# EAGLE board Prueba1 (EAGLE 9.7.0)

Size 362.69 x 140.34 mm. Coordinates in mm from the lower left corner, seen from the top.
Outline: 0,0 362.69,0 362.69,140.34 0,140.34 0,0
Copper layers (1*16): Top 0.035mm / dielectric 1.5mm / Bottom 0.035mm
Design rules "default": minimum track width 6mil, minimum drill 0.35mm, track to track 6mil, track to pad 6mil, pad to pad 6mil, via to via 6mil, smd to smd 6mil, copper to edge 40mil, drill to drill 6mil, minimum pad ring 10mil, minimum via ring 8mil, stop-mask expansion 4mil, vias tented up to drill 0mil, thermal gap 10mil

## Footprints (pad centres in the part's own frame; a part is rotated, then mirrored left to right if it is on the bottom)
LEDRD254W60D565H860B = drill 0.981 pad 1.581: 1 -1.27,0; 2 1.27,0
RESAD1016W63L850D250B = drill 0.83 pad 1.43: 1 -5.08,0; 2 5.08,0
DIP762W53P254L1969H508Q16B = drill 0.743 pad 1.343: 1 -3.81,8.89; 2 -3.81,6.35; 3 -3.81,3.81; 4 -3.81,1.27; 5 -3.81,-1.27; 6 -3.81,-3.81; 7 -3.81,-6.35; 8 -3.81,-8.89; 9 3.81,-8.89; 10 3.81,-6.35; 11 3.81,-3.81; 12 3.81,-1.27; 13 3.81,1.27; 14 3.81,3.81; 15 3.81,6.35; 16 3.81,8.89
ARDUINO-UNO-R3-SHIELD = drill 1.016 pad 1.88: 3.3V 24.13,-2.54; 5V 24.13,0; A0 24.13,12.7; A1 24.13,15.24; A2 24.13,17.78; A3 24.13,20.32; A4 24.13,22.86; A5 24.13,25.4; AREF -24.13,-13.97; D2 -24.13,20.32; D3 -24.13,17.78; D4 -24.13,15.24; D5 -24.13,12.7; D6 -24.13,10.16; D7 -24.13,7.62; D8 -24.13,3.81; D9 -24.13,1.27; D10 -24.13,-1.27; D11 -24.13,-3.81; D12 -24.13,-6.35; D13 -24.13,-8.89; GND@0 24.13,2.54; GND@1 24.13,5.08; GND@2 -24.13,-11.43; IOREF 24.13,-7.62; NC 24.13,-10.16; RES 24.13,-5.08; RX -24.13,25.4; SCL -24.13,-19.05; SDA -24.13,-16.51; TX -24.13,22.86; VIN 24.13,7.62

## Placement (x,y rotation side)
D1  RED  [LEDRD254W60D565H860B]  107.71,26.48 0 top
D2  RED  [LEDRD254W60D565H860B]  114.22,26.36 0 top
D3  RED  [LEDRD254W60D565H860B]  120.35,26.23 0 top
D4  RED  [LEDRD254W60D565H860B]  126.22,26.19 0 top
D5  RED  [LEDRD254W60D565H860B]  132.02,26.09 0 top
D6  RED  [LEDRD254W60D565H860B]  137.71,26.12 0 top
D7  RED  [LEDRD254W60D565H860B]  143.28,26.08 0 top
D8  RED  [LEDRD254W60D565H860B]  148.67,26.13 0 top
D9  RED  [LEDRD254W60D565H860B]  108.87,76.98 0 top
D10  RED  [LEDRD254W60D565H860B]  114.3,77.15 0 top
D11  RED  [LEDRD254W60D565H860B]  119.97,77.11 0 top
D12  RED  [LEDRD254W60D565H860B]  125.65,77.1 0 top
D13  RED  [LEDRD254W60D565H860B]  131.21,77.17 0 top
D14  RED  [LEDRD254W60D565H860B]  136.57,77.17 0 top
D15  RED  [LEDRD254W60D565H860B]  141.55,76.94 0 top
D16  RED  [LEDRD254W60D565H860B]  147.26,77.17 0 top
D17  RED  [LEDRD254W60D565H860B]  107.97,66.52 0 top
D18  RED  [LEDRD254W60D565H860B]  113.41,66.4 0 top
D19  RED  [LEDRD254W60D565H860B]  119.52,66.24 0 top
D20  RED  [LEDRD254W60D565H860B]  125.32,66.11 0 top
D21  RED  [LEDRD254W60D565H860B]  131.13,65.96 0 top
D22  RED  [LEDRD254W60D565H860B]  136.31,66.19 0 top
D23  RED  [LEDRD254W60D565H860B]  141.53,66.21 0 top
D24  RED  [LEDRD254W60D565H860B]  147.62,66.4 0 top
D25  RED  [LEDRD254W60D565H860B]  108.29,55.86 0 top
D26  RED  [LEDRD254W60D565H860B]  113.87,55.67 0 top
D27  RED  [LEDRD254W60D565H860B]  119.78,55.81 0 top
D28  RED  [LEDRD254W60D565H860B]  125.63,55.85 0 top
D29  RED  [LEDRD254W60D565H860B]  131.77,55.85 0 top
D30  RED  [LEDRD254W60D565H860B]  137.34,55.87 0 top
D31  RED  [LEDRD254W60D565H860B]  142.61,55.88 0 top
D32  RED  [LEDRD254W60D565H860B]  147.83,55.83 0 top
D33  RED  [LEDRD254W60D565H860B]  107.87,46.09 0 top
D34  RED  [LEDRD254W60D565H860B]  114.45,46.16 0 top
D35  RED  [LEDRD254W60D565H860B]  120.6,46.2 0 top
D36  RED  [LEDRD254W60D565H860B]  126.04,46.17 0 top
D37  RED  [LEDRD254W60D565H860B]  131.91,46.08 0 top
D38  RED  [LEDRD254W60D565H860B]  137.69,46.07 0 top
D39  RED  [LEDRD254W60D565H860B]  143,46.02 0 top
D40  RED  [LEDRD254W60D565H860B]  148.37,45.99 0 top
D41  RED  [LEDRD254W60D565H860B]  107.68,36.02 0 top
D42  RED  [LEDRD254W60D565H860B]  114.49,36.02 0 top
D43  RED  [LEDRD254W60D565H860B]  120.67,35.92 0 top
D44  RED  [LEDRD254W60D565H860B]  126.16,35.9 0 top
D45  RED  [LEDRD254W60D565H860B]  131.88,35.75 0 top
D46  RED  [LEDRD254W60D565H860B]  137.4,35.64 0 top
D47  RED  [LEDRD254W60D565H860B]  142.83,35.67 0 top
D48  RED  [LEDRD254W60D565H860B]  148.43,35.58 0 top
D49  RED  [LEDRD254W60D565H860B]  107.76,17.01 0 top
D50  RED  [LEDRD254W60D565H860B]  114.26,16.93 0 top
D51  RED  [LEDRD254W60D565H860B]  120.55,16.8 0 top
D52  RED  [LEDRD254W60D565H860B]  126.43,16.81 0 top
D53  RED  [LEDRD254W60D565H860B]  132.04,16.81 0 top
D54  RED  [LEDRD254W60D565H860B]  137.85,16.77 0 top
D55  RED  [LEDRD254W60D565H860B]  143.66,16.78 0 top
D56  RED  [LEDRD254W60D565H860B]  149.03,16.7 0 top
D57  RED  [LEDRD254W60D565H860B]  107.9,8.45 0 top
D58  RED  [LEDRD254W60D565H860B]  114.32,8.42 0 top
D59  RED  [LEDRD254W60D565H860B]  120.55,8.51 0 top
D60  RED  [LEDRD254W60D565H860B]  126.31,8.36 0 top
D61  RED  [LEDRD254W60D565H860B]  132.26,8.23 0 top
D62  RED  [LEDRD254W60D565H860B]  137.92,8.05 0 top
D63  RED  [LEDRD254W60D565H860B]  143.92,7.91 0 top
D64  RED  [LEDRD254W60D565H860B]  149.89,8.06 0 top
R1  470  [RESAD1016W63L850D250B]  282.96,99.43 270 top
R2  470  [RESAD1016W63L850D250B]  285.5,99.43 270 top
R3  470  [RESAD1016W63L850D250B]  288.04,99.43 270 top
R4  470  [RESAD1016W63L850D250B]  290.58,99.43 270 top
R5  470  [RESAD1016W63L850D250B]  293.12,99.43 270 top
R6  470  [RESAD1016W63L850D250B]  295.66,99.43 270 top
R7  470  [RESAD1016W63L850D250B]  298.2,99.43 270 top
R8  470  [RESAD1016W63L850D250B]  300.74,99.43 270 top
R9  470  [RESAD1016W63L850D250B]  107.82,99.5 270 top
R10  470  [RESAD1016W63L850D250B]  112.9,99.5 270 top
R11  470  [RESAD1016W63L850D250B]  115.44,99.5 270 top
R12  470  [RESAD1016W63L850D250B]  117.98,99.5 270 top
R13  470  [RESAD1016W63L850D250B]  120.52,99.5 270 top
R14  470  [RESAD1016W63L850D250B]  123.06,99.5 270 top
R15  470  [RESAD1016W63L850D250B]  125.6,99.5 270 top
R16  470  [RESAD1016W63L850D250B]  128.14,99.5 270 top
R17  470  [RESAD1016W63L850D250B]  138.3,99.5 270 top
R18  470  [RESAD1016W63L850D250B]  140.84,99.5 270 top
R19  470  [RESAD1016W63L850D250B]  143.38,99.5 270 top
R20  470  [RESAD1016W63L850D250B]  145.92,99.5 270 top
R21  470  [RESAD1016W63L850D250B]  148.46,99.5 270 top
R22  470  [RESAD1016W63L850D250B]  151,99.5 270 top
R23  470  [RESAD1016W63L850D250B]  153.54,99.5 270 top
R24  470  [RESAD1016W63L850D250B]  156.08,99.5 270 top
R25  470  [RESAD1016W63L850D250B]  166.24,99.5 270 top
R26  470  [RESAD1016W63L850D250B]  168.78,99.5 270 top
R27  470  [RESAD1016W63L850D250B]  171.32,99.5 270 top
R28  470  [RESAD1016W63L850D250B]  173.86,99.5 270 top
R29  470  [RESAD1016W63L850D250B]  176.4,99.5 270 top
R30  470  [RESAD1016W63L850D250B]  178.94,99.5 270 top
R31  470  [RESAD1016W63L850D250B]  181.48,99.5 270 top
R32  470  [RESAD1016W63L850D250B]  184.02,99.5 270 top
R33  470  [RESAD1016W63L850D250B]  194.18,99.5 270 top
R34  470  [RESAD1016W63L850D250B]  196.72,99.5 270 top
R35  470  [RESAD1016W63L850D250B]  199.26,99.5 270 top
R36  470  [RESAD1016W63L850D250B]  201.8,99.5 270 top
R37  470  [RESAD1016W63L850D250B]  204.34,99.5 270 top
R38  470  [RESAD1016W63L850D250B]  206.88,99.5 270 top
R39  470  [RESAD1016W63L850D250B]  209.42,99.5 270 top
R40  470  [RESAD1016W63L850D250B]  211.96,99.5 270 top
R41  470  [RESAD1016W63L850D250B]  222.12,99.5 270 top
R42  470  [RESAD1016W63L850D250B]  224.66,99.5 270 top
R43  470  [RESAD1016W63L850D250B]  227.2,99.5 270 top
R44  470  [RESAD1016W63L850D250B]  229.74,99.5 270 top
R45  470  [RESAD1016W63L850D250B]  232.28,99.5 270 top
R46  470  [RESAD1016W63L850D250B]  234.82,99.5 270 top
R47  470  [RESAD1016W63L850D250B]  237.36,99.5 270 top
R48  470  [RESAD1016W63L850D250B]  239.9,99.5 270 top
R49  470  [RESAD1016W63L850D250B]  308.36,99.43 270 top
R50  470  [RESAD1016W63L850D250B]  310.9,99.43 270 top
R51  470  [RESAD1016W63L850D250B]  313.44,99.43 270 top
R52  470  [RESAD1016W63L850D250B]  315.98,99.43 270 top
R53  470  [RESAD1016W63L850D250B]  318.52,99.43 270 top
R54  470  [RESAD1016W63L850D250B]  321.06,99.43 270 top
R55  470  [RESAD1016W63L850D250B]  323.6,99.43 270 top
R56  470  [RESAD1016W63L850D250B]  326.14,99.43 270 top
R57  470  [RESAD1016W63L850D250B]  336.3,99.43 270 top
R58  470  [RESAD1016W63L850D250B]  338.84,99.43 270 top
R59  470  [RESAD1016W63L850D250B]  341.38,99.43 270 top
R60  470  [RESAD1016W63L850D250B]  343.92,99.43 270 top
R61  470  [RESAD1016W63L850D250B]  346.46,99.43 270 top
R62  470  [RESAD1016W63L850D250B]  349,99.43 270 top
R63  470  [RESAD1016W63L850D250B]  351.54,99.43 270 top
R64  470  [RESAD1016W63L850D250B]  354.08,99.43 270 top
U2  74HC595_PDIP  [DIP762W53P254L1969H508Q16B]  121.79,110.93 90 top
U3  74HC595_PDIP  [DIP762W53P254L1969H508Q16B]  149.73,110.93 90 top
U4  ARDUINO-UNO-R3-SHIELD  [ARDUINO-UNO-R3-SHIELD]  47.88,110.49 270 top
U5  74HC595_PDIP  [DIP762W53P254L1969H508Q16B]  177.67,110.93 90 top
U6  74HC595_PDIP  [DIP762W53P254L1969H508Q16B]  205.61,110.93 90 top
U7  74HC595_PDIP  [DIP762W53P254L1969H508Q16B]  233.55,110.93 90 top
U10  74HC595_PDIP  [DIP762W53P254L1969H508Q16B]  294.39,110.86 90 top
U11  74HC595_PDIP  [DIP762W53P254L1969H508Q16B]  319.79,110.86 90 top
U12  74HC595_PDIP  [DIP762W53P254L1969H508Q16B]  347.73,110.86 90 top

## Library data of the parts
D1-D64 = Tinkercad; CATEGORY: Opto-Electronic; SUB-CATEGORY: LED; VALUE: LED_RED
R1-R64 U2-U7 U10-U12 = Tinkercad

## Nets
D1_A: D1.1 R1.2
D2_A: D2.1 R2.2
D3_A: D3.1 R3.2
D4_A: D4.1 R4.2
D5_A: D5.1 R5.2
D6_A: D6.1 R6.2
D7_A: D7.1 R7.2
D8_A: D8.1 R8.2
D9_A: D9.1 R9.2
D10_A: D10.1 R10.2
D11_A: D11.1 R11.2
D12_A: D12.1 R12.2
D13_A: D13.1 R13.2
D14_A: D14.1 R14.2
D15_A: D15.1 R15.2
D16_A: D16.1 R16.2
D17_A: D17.1 R17.2
D18_A: D18.1 R18.2
D19_A: D19.1 R19.2
D20_A: D20.1 R20.2
D21_A: D21.1 R21.2
D22_A: D22.1 R22.2
D23_A: D23.1 R23.2
D24_A: D24.1 R24.2
D24_C: D17.2 D18.2 D19.2 D20.2 D21.2 D22.2 D23.2 D24.2
D25_A: D25.1 R25.2
D26_A: D26.1 R26.2
D27_A: D27.1 R27.2
D28_A: D28.1 R28.2
D29_A: D29.1 R29.2
D30_A: D30.1 R30.2
D31_A: D31.1 R31.2
D32_A: D32.1 R32.2
D33_A: D33.1 R33.2
D34_A: D34.1 R34.2
D35_A: D35.1 R35.2
D36_A: D36.1 R36.2
D37_A: D37.1 R37.2
D38_A: D38.1 R38.2
D39_A: D39.1 R39.2
D40_A: D40.1 R40.2
D41_A: D41.1 R41.2
D42_A: D42.1 R42.2
D43_A: D43.1 R43.2
D44_A: D44.1 R44.2
D45_A: D45.1 R45.2
D46_A: D46.1 R46.2
D47_A: D47.1 R47.2
D48_A: D48.1 R48.2
D49_A: D49.1 R49.2
D50_A: D50.1 R50.2
D51_A: D51.1 R51.2
D52_A: D52.1 R52.2
D53_A: D53.1 R53.2
D54_A: D54.1 R54.2
D55_A: D55.1 R55.2
D56_A: D56.1 R56.2
D57_A: D57.1 R57.2
D58_A: D58.1 R58.2
D59_A: D59.1 R59.2
D60_A: D60.1 R60.2
D61_A: D61.1 R61.2
D62_A: D62.1 R62.2
D63_A: D63.1 R63.2
D64_A: D64.1 R64.2
U2_Q0: R9.1 U2.15
U2_Q1: R10.1 U2.1
U2_Q2: R11.1 U2.2
U2_Q3: R12.1 U2.3
U2_Q4: R13.1 U2.4
U2_Q5: R14.1 U2.5
U2_Q6: R15.1 U2.6
U2_Q7: R16.1 U2.7
U3_Q0: R17.1 U3.15
U3_Q1: R18.1 U3.1
U3_Q2: R19.1 U3.2
U3_Q3: R20.1 U3.3
U3_Q4: R21.1 U3.4
U3_Q5: R22.1 U3.5
U3_Q6: R23.1 U3.6
U3_Q7: R24.1 U3.7
U4_5V: U2.10 U2.16 U3.10 U3.16 U4.5V U5.10 U5.16 U6.10 U6.16 U7.10 U7.16 U10.10 U10.16 U11.10 U11.16 U12.10 U12.16
U4_D2: U2.14 U3.14 U4.D2 U5.14 U6.14 U7.14 U10.14 U11.14 U12.14
U4_D3: U2.12 U3.12 U4.D3 U5.12 U6.12 U7.12 U10.12 U11.12 U12.12
U4_D4: U2.11 U3.11 U4.D4 U5.11 U6.11 U7.11 U10.11 U11.11 U12.11
U4_GND: D1.2 D2.2 D3.2 D4.2 D5.2 D6.2 D7.2 D8.2 D9.2 D10.2 D11.2 D12.2 D13.2 D14.2 D15.2 D16.2 D17.2 D18.2 D19.2 D20.2 D21.2 D22.2 D23.2 D24.2 D25.2 D26.2 D27.2 D28.2 D29.2 D30.2 D31.2 D32.2 D33.2 D34.2 D35.2 D36.2 D37.2 D38.2 D39.2 D40.2 D41.2 D42.2 D43.2 D44.2 D45.2 D46.2 D47.2 D48.2 D49.2 D50.2 D51.2 D52.2 D53.2 D54.2 D55.2 D56.2 D57.2 D58.2 D59.2 D60.2 D61.2 D62.2 D63.2 D64.2 U2.8 U2.13 U3.8 U3.13 U4.GND@0 U4.GND@1 U4.GND@2 U5.8 U5.13 U6.8 U6.13 U7.8 U7.13 U10.8 U10.13 U11.8 U11.13 U12.8 U12.13
U5_Q0: R25.1 U5.15
U5_Q1: R26.1 U5.1
U5_Q2: R27.1 U5.2
U5_Q3: R28.1 U5.3
U5_Q4: R29.1 U5.4
U5_Q5: R30.1 U5.5
U5_Q6: R31.1 U5.6
U5_Q7: R32.1 U5.7
U6_Q0: R33.1 U6.15
U6_Q1: R34.1 U6.1
U6_Q2: R35.1 U6.2
U6_Q3: R36.1 U6.3
U6_Q4: R37.1 U6.4
U6_Q5: R38.1 U6.5
U6_Q6: R39.1 U6.6
U6_Q7: R40.1 U6.7
U7_Q0: R41.1 U7.15
U7_Q1: R42.1 U7.1
U7_Q2: R43.1 U7.2
U7_Q3: R44.1 U7.3
U7_Q4: R45.1 U7.4
U7_Q5: R46.1 U7.5
U7_Q6: R47.1 U7.6
U7_Q7: R48.1 U7.7
U10_Q0: R1.1 U10.15
U10_Q1: R2.1 U10.1
U10_Q2: R3.1 U10.2
U10_Q3: R4.1 U10.3
U10_Q4: R5.1 U10.4
U10_Q5: R6.1 U10.5
U10_Q6: R7.1 U10.6
U10_Q7: R8.1 U10.7
U11_Q0: R49.1 U11.15
U11_Q1: R50.1 U11.1
U11_Q2: R51.1 U11.2
U11_Q3: R52.1 U11.3
U11_Q4: R53.1 U11.4
U11_Q5: R54.1 U11.5
U11_Q6: R55.1 U11.6
U11_Q7: R56.1 U11.7
U12_Q0: R57.1 U12.15
U12_Q1: R58.1 U12.1
U12_Q2: R59.1 U12.2
U12_Q3: R60.1 U12.3
U12_Q4: R61.1 U12.4
U12_Q5: R62.1 U12.5
U12_Q6: R63.1 U12.6
U12_Q7: R64.1 U12.7

## Tracks (layer width: path | path; a pad name or v marks a point on that pad's centre or on a via)
D1_A  (1 unrouted)
D2_A  (1 unrouted)
D3_A  (1 unrouted)
D4_A  (1 unrouted)
D5_A  (1 unrouted)
D6_A  (1 unrouted)
D7_A  (1 unrouted)
D8_A  (1 unrouted)
D9_A  (1 unrouted)
D10_A  (1 unrouted)
D11_A  (1 unrouted)
D12_A  (1 unrouted)
D13_A  (1 unrouted)
D14_A  (1 unrouted)
D15_A  (1 unrouted)
D16_A  (1 unrouted)
D17_A  (1 unrouted)
D18_A  (1 unrouted)
D19_A  (1 unrouted)
D20_A  (1 unrouted)
D21_A  (1 unrouted)
D22_A  (1 unrouted)
D23_A  (1 unrouted)
D24_A  (1 unrouted)
D24_C  (7 unrouted)
D25_A  (1 unrouted)
D26_A  (1 unrouted)
D27_A  (1 unrouted)
D28_A  (1 unrouted)
D29_A  (1 unrouted)
D30_A  (1 unrouted)
D31_A  (1 unrouted)
D32_A  (1 unrouted)
D33_A  (1 unrouted)
D34_A  (1 unrouted)
D35_A  (1 unrouted)
D36_A  (1 unrouted)
D37_A  (1 unrouted)
D38_A  (1 unrouted)
D39_A  (1 unrouted)
D40_A  (1 unrouted)
D41_A  (1 unrouted)
D42_A  (1 unrouted)
D43_A  (1 unrouted)
D44_A  (1 unrouted)
D45_A  (1 unrouted)
D46_A  (1 unrouted)
D47_A  (1 unrouted)
D48_A  (1 unrouted)
D49_A  (1 unrouted)
D50_A  (1 unrouted)
D51_A  (1 unrouted)
D52_A  (1 unrouted)
D53_A  (1 unrouted)
D54_A  (1 unrouted)
D55_A  (1 unrouted)
D56_A  (1 unrouted)
D57_A  (1 unrouted)
D58_A  (1 unrouted)
D59_A  (1 unrouted)
D60_A  (1 unrouted)
D61_A  (1 unrouted)
D62_A  (1 unrouted)
D63_A  (1 unrouted)
D64_A  (1 unrouted)
U2_Q0  (1 unrouted)
U2_Q1  (1 unrouted)
U2_Q2  (1 unrouted)
U2_Q3  (1 unrouted)
U2_Q4  (1 unrouted)
U2_Q5  (1 unrouted)
U2_Q6  (1 unrouted)
U2_Q7  (1 unrouted)
U3_Q0  (1 unrouted)
U3_Q1  (1 unrouted)
U3_Q2  (1 unrouted)
U3_Q3  (1 unrouted)
U3_Q4  (1 unrouted)
U3_Q5  (1 unrouted)
U3_Q6  (1 unrouted)
U3_Q7  (1 unrouted)
U4_5V  (16 unrouted)
U4_D2  (8 unrouted)
U4_D3  (8 unrouted)
U4_D4  (8 unrouted)
U4_GND  (82 unrouted)
U5_Q0  (1 unrouted)
U5_Q1  (1 unrouted)
U5_Q2  (1 unrouted)
U5_Q3  (1 unrouted)
U5_Q4  (1 unrouted)
U5_Q5  (1 unrouted)
U5_Q6  (1 unrouted)
U5_Q7  (1 unrouted)
U6_Q0  (1 unrouted)
U6_Q1  (1 unrouted)
U6_Q2  (1 unrouted)
U6_Q3  (1 unrouted)
U6_Q4  (1 unrouted)
U6_Q5  (1 unrouted)
U6_Q6  (1 unrouted)
U6_Q7  (1 unrouted)
U7_Q0  (1 unrouted)
U7_Q1  (1 unrouted)
U7_Q2  (1 unrouted)
U7_Q3  (1 unrouted)
U7_Q4  (1 unrouted)
U7_Q5  (1 unrouted)
U7_Q6  (1 unrouted)
U7_Q7  (1 unrouted)
U10_Q0  (1 unrouted)
U10_Q1  (1 unrouted)
U10_Q2  (1 unrouted)
U10_Q3  (1 unrouted)
U10_Q4  (1 unrouted)
U10_Q5  (1 unrouted)
U10_Q6  (1 unrouted)
U10_Q7  (1 unrouted)
U11_Q0  (1 unrouted)
U11_Q1  (1 unrouted)
U11_Q2  (1 unrouted)
U11_Q3  (1 unrouted)
U11_Q4  (1 unrouted)
U11_Q5  (1 unrouted)
U11_Q6  (1 unrouted)
U11_Q7  (1 unrouted)
U12_Q0  (1 unrouted)
U12_Q1  (1 unrouted)
U12_Q2  (1 unrouted)
U12_Q3  (1 unrouted)
U12_Q4  (1 unrouted)
U12_Q5  (1 unrouted)
U12_Q6  (1 unrouted)
U12_Q7  (1 unrouted)